# Altium PCB pay-optical.PcbDoc (part 3 of 5)
Units mm, origin at the board's own origin, x right, y up, seen from the top; angles counter-clockwise.
Board outline 128 x 54 mm, 4 copper layers (Top Layer, GND, VCC, Bottom Layer), stack 0.778 mm thick; 461 components, 247 nets, 1368 pads, 498 vias.
Unrouted connection lines stored in the file: 117.
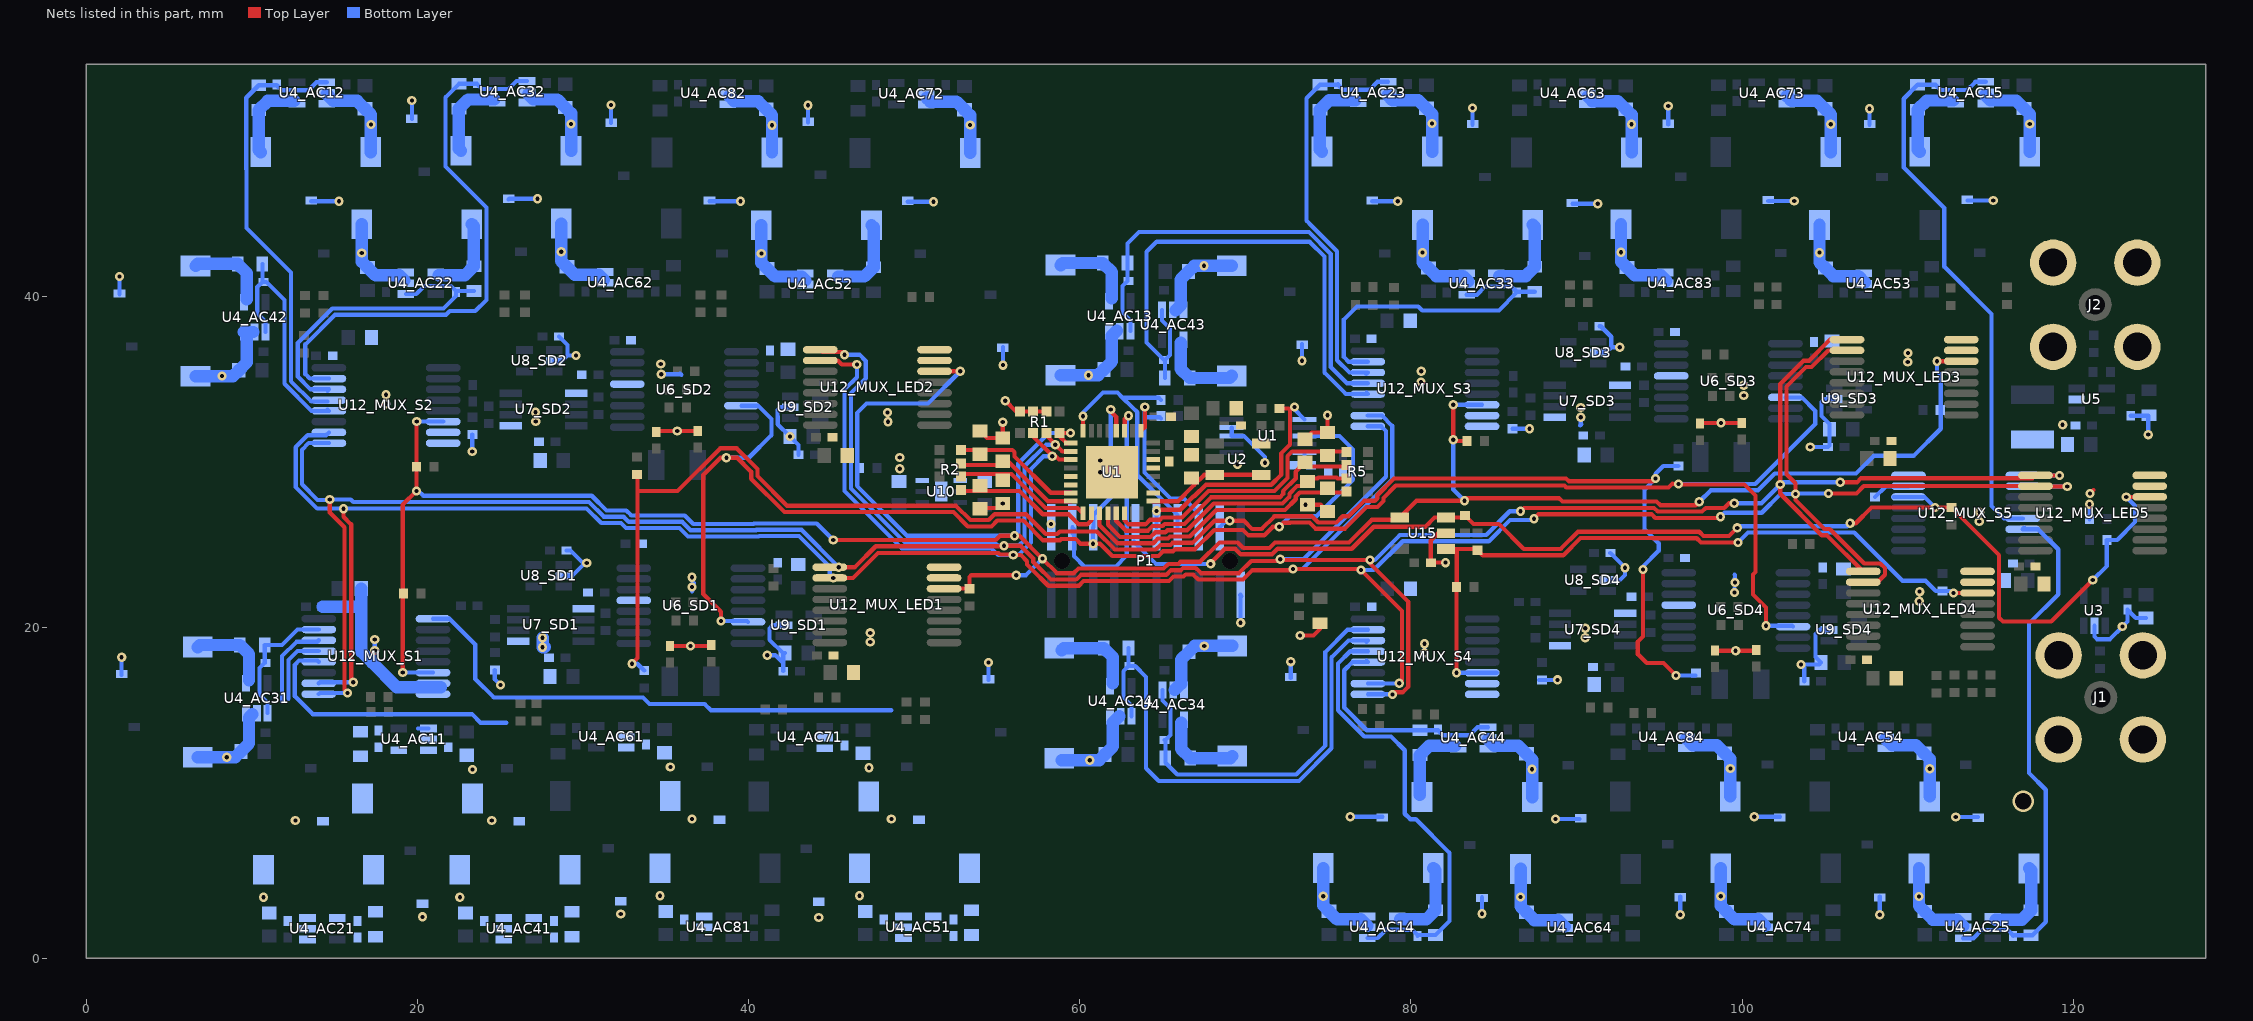
[diagram p5: the nets of this part, all layers, seen from the top]

## Via types
v1: diameter 0.559, hole 0.254, Top Layer to Bottom Layer, 442 vias
v2: diameter 2.362, hole 2.1, Top Layer to Bottom Layer, 34 vias
v3: diameter 1.3, hole 1, Top Layer to Bottom Layer, 14 vias
v4: diameter 6, hole 3.6, Top Layer to Bottom Layer, 8 vias

## Nets (pads, with @x,y where several pads share a name; then routed paths per layer and width w, separated by ;. In a path a pad name is that pad's centre, name@x,y a point inside that pad or via, vN(x,y) a via of type N, cw(c..) or ccw(c..) an arc to the next point about the centre after c; other vN are vias at no path point) (continued)
A1: R1.2 U1.3@59.461,30.124 U12_MUX_LED1.10 U12_MUX_LED2.10 U12_MUX_LED3.10 U12_MUX_LED4.10 U12_MUX_LED5.10 U12_MUX_S1.10 U12_MUX_S2.10 U12_MUX_S3.10 U12_MUX_S4.10 U12_MUX_S5.10 | length 210.1
  Top Layer w0.254: v1(15.545,27.153) 15.545,26.67 16.002,26.213 16.002,16.802 v1(16.129,16.675) ; U12_MUX_LED2.10@44.332,36.107 45.384,36.107 45.626,35.865 v1(46.54,35.865) ; v1(45.11,22.975) 46.305,22.975 47.815,24.485 55.1,24.485 55.202,24.384 55.956,24.384 v1(55.982,24.359) 56.442,24.359 56.813,23.987 56.813,23.786 57.078,23.522 58.098,22.501 59.952,22.501 60.234,22.784 65.381,22.784 65.661,23.064 66.269,23.064 66.396,23.19 66.85,23.19 67.157,22.882 69.859,22.882 70.42,23.444 v1@72.695,23.444 ; R1.2@57.182,31.735 57.182,31.515 58.344,30.353 v1(58.344,30.328) 58.539,30.328 58.743,30.124 U1.3@59.461,30.124 ; v1(72.876,23.517) 76.733,23.517 76.95,23.3 76.98,23.33 v1(76.98,23.45) 76.987,23.45 79.451,20.986 79.451,16.774 v1(79.288,16.612) ; v1(87.425,26.55) 87.702,26.827 94.525,26.827 94.751,26.601 97.788,26.601 97.792,26.596 v1@98.7,26.596 ; v1(105.209,28.075) 106.899,28.075 107.345,28.521 U12_MUX_LED5.10@117.712,28.521 117.735,28.499 v1(119.634,28.499) ; U12_MUX_LED3.10@106.333,36.717 105.199,36.717 104.193,35.711 103.865,35.711 102.681,34.527 102.681,29.238 103.225,28.694 v1(103.225,28.05) 103.225,27.675 104.969,25.931 105.291,25.931 107.375,23.847 108.338,23.847 108.619,23.566 108.619,23.17 108.167,22.718 U12_MUX_LED4.10@107.798,22.718
  Bottom Layer w0.254: U12_MUX_S1.10@14.046,16.611 14.11,16.675 v1(16.129,16.675) ; U12_MUX_S2.10@14.655,31.766 14.484,31.595 13.375,31.595 12.649,30.869 12.649,28.473 13.948,27.175 15.523,27.175 v1(15.545,27.153) 15.57,27.178 30.212,27.178 31.101,26.289 32.298,26.289 32.603,25.984 35.833,25.984 36.341,25.476 40.614,25.476 40.639,25.502 43.037,25.502 44.907,23.632 44.907,23.179 v1(45.11,22.975) ; v1(46.54,35.865) 46.54,35.092 45.796,34.349 45.796,28.223 49.254,24.765 54.666,24.765 55.073,24.359 v1(55.982,24.359) 56.29,24.359 57.048,25.117 57.048,29.56 57.816,30.328 v1(58.344,30.328) ; v1(72.876,23.517) 73.456,23.517 78.867,28.928 78.867,32.161 78.246,32.782 U12_MUX_S3.10@77.393,32.782 ; v1(76.98,23.45) 77.757,23.45 79.502,25.195 84.704,25.195 85.975,26.467 87.342,26.467 v1(87.425,26.55) ; U12_MUX_S4.10@77.4,16.597 79.273,16.597 v1(79.288,16.612) ; v1(98.7,26.675) 98.941,26.916 101.185,26.916 102.318,28.05 v1(103.225,28.05) 103.25,28.075 v1(105.209,28.075) ; U12_MUX_S5.10@116.942,28.516 116.985,28.473 117.01,28.499 v1(119.634,28.499)
A2: R1.3 U1.2@59.461,30.607 U12_MUX_LED1.9 U12_MUX_LED2.9 U12_MUX_LED3.9 U12_MUX_LED4.9 U12_MUX_LED5.9 U12_MUX_S1.9 U12_MUX_S2.9 U12_MUX_S3.9 U12_MUX_S4.9 U12_MUX_S5.9 | length 207.1
  Top Layer w0.254: v1(14.707,27.708) 14.707,26.924 15.596,26.035 15.596,16.205 v1(15.773,16.027) ; U12_MUX_LED2.9@44.332,36.757 44.462,36.627 45.618,36.627 v1(45.787,36.458) ; v1(45.441,23.625) 46.416,23.625 47.683,24.892 55.397,24.892 v1(55.423,24.917) 56.422,24.917 57.194,24.145 57.194,23.944 57.459,23.68 58.256,22.882 59.794,22.882 60.076,23.165 65.223,23.165 65.503,23.445 66.112,23.445 66.238,23.571 67.007,23.571 67.315,23.263 69.621,23.263 70.358,24 72.006,24 v1(72.111,24.105) 72.15,24.065 v1@77.525,24.065 ; R1.3@57.982,31.735 57.982,31.576 58.522,31.036 v1(58.522,31.013) ; v1@58.658,30.896 58.947,30.607 U1.2@59.461,30.607 ; v1@77.551,24.066 v1(77.525,24.066) ; v1@77.551,24.065 v1@77.525,24.065 ; v1(78.892,15.931) 79.039,16.078 79.509,16.078 79.832,16.401 79.832,21.543 77.525,23.85 v1@77.525,24.065 ; v1(86.619,27) 86.827,27.208 94.683,27.208 94.909,26.982 97.575,26.982 97.801,27.208 98.921,27.208 99.201,27.488 v1(99.525,27.488) ; v1(105.925,28.75) 106.931,28.75 107.181,29 117.541,29 U12_MUX_LED5.9@117.712,29.171 119.165,29.171 v1(119.17,29.166) ; U12_MUX_LED3.9@106.333,37.367 105.31,37.367 104.035,36.092 103.707,36.092 102.3,34.685 v1(102.3,28.625) 102.3,28.061 104.811,25.55 105.133,25.55 U12_MUX_LED4.9@107.315,23.368
  Bottom Layer w0.254: U12_MUX_S1.9@14.046,15.961 14.113,16.027 v1(15.773,16.027) ; v1@14.652,27.686 13.975,27.686 13.03,28.631 13.03,30.712 13.435,31.116 U12_MUX_S2.9@14.655,31.116 ; v1(14.707,27.708) 15.977,27.708 16.126,27.559 30.37,27.559 31.259,26.67 32.456,26.67 32.761,26.365 35.991,26.365 36.499,25.857 40.456,25.857 40.482,25.883 43.195,25.883 45.441,23.637 v1(45.441,23.625) ; v1(45.787,36.458) 46.7,36.458 47.073,36.086 47.073,35.029 46.177,34.133 46.177,28.381 49.412,25.146 54.824,25.146 55.053,24.917 v1(55.423,24.917) 56.31,24.917 56.667,25.275 56.667,29.718 57.963,31.013 v1(58.522,31.013) ; v1(72.111,24.105) 73.505,24.105 78.486,29.086 78.486,31.849 78.202,32.132 U12_MUX_S3.9@77.393,32.132 ; U12_MUX_S4.9@77.4,15.947 78.908,15.947 v1(78.892,15.931) ; v1(77.525,24.066) 77.819,24.066 79.329,25.576 84.546,25.576 85.97,27 v1(86.619,27) ; v1(99.525,27.488) 101.163,27.488 v1(102.3,28.625) 102.425,28.75 v1(105.925,28.75) ; U12_MUX_S5.9@116.942,29.166 v1(119.17,29.166) v1@119.177,29.166
ADC_C\S\_1: P1.14 R3.1@64.9,33.725 U1.32 | length 15.7
  Top Layer w0.254: U1.32@60.198,31.852 v1(60.198,32.746)
  Bottom Layer w0.254: v1(60.198,32.746) 60.198,32.962 61.407,34.171 62.279,34.171 62.596,33.853 ; R3.1@64.9,33.725 64.772,33.853 62.596,33.853 ; P1.14@65.905,26.032 65.905,26.772 63.475,29.203 63.475,32.987 63.162,33.299 63.15,33.299 62.596,33.853
ADC_S\Y\N\C\_1: P1.16 R4.1@64.9,32.766 U1.25 | length 10.8
  Top Layer w0.254: U1.25@63.703,31.852 63.932,32.08 v1(63.932,33.299)
  Bottom Layer w0.254: v1(63.932,33.299) 63.906,33.274 63.906,32.675 ; R4.1@64.9,32.6 64.825,32.675 63.906,32.675 ; P1.16@67.175,26.878 66.291,27.762 65.481,27.762 63.906,29.337 63.906,32.675
CLKIN_1: P1.18 R14_SD1.2 R14_SD2.2 R14_SD3.2 R14_SD4.2 | length 99.3
  Top Layer w0.254: v1(32.961,17.797) 33.299,18.136 33.299,28.219 ; R14_SD2.2@33.274,29.218 33.299,29.193 33.299,28.219 ; v1(94.013,23.487) 94.013,19.441 93.701,19.129 93.701,18.371 94.236,17.835 95.254,17.835 v1(96.004,17.086) ; v1@94.775,28.825 v1(94.775,28.979) 94.609,28.813 89.54,28.813 89.372,28.981 78.974,28.981 77.963,27.97 77.963,27.783 77.814,27.634 77.164,27.634 76.23,26.7 75.879,26.7 75.511,26.332 74.4,26.332 74.032,26.7 72.56,26.7 72.555,26.695 71.751,26.695 70.985,25.93 70.412,25.93 69.916,26.426 v1(69.053,26.426) 68.129,26.426 66.798,25.095 65.607,25.095 65.48,24.969 64.872,24.969 64.592,24.689 62.118,24.689 61.025,25.781 58.793,25.781 58.641,25.629 57.945,25.629 56.751,26.822 54.86,26.822 54.505,26.467 53.394,26.467 52.531,27.33 49.994,27.33 49.989,27.336 42.328,27.336 40.538,29.125 40.538,29.549 39.281,30.806 38.295,30.806 35.709,28.219 33.299,28.219
  Bottom Layer w0.254: v1(32.961,17.797) 33.279,17.797 R14_SD1.2@33.698,17.378 ; P1.18@68.445,26.032 v1@68.831,26.419 ; v1(94.013,23.487) 94.013,23.67 94.966,24.623 94.966,25.065 94.1,25.931 94.1,28.304 v1(94.775,28.979) 94.775,29.268 95.237,29.73 R14_SD3.2@96.144,29.73 ; v1(96.004,17.086) R14_SD4.2@97.18,17.086
DAC_C\S\_1: P1.12 R3.1@72.075,33.215 U1.6@73.576,32.55 | length 15.4
  Top Layer w0.254: v1(64.628,27.026) 64.628,27.097 66.068,27.097 66.878,27.907 66.916,27.907 67.615,28.606 71.567,28.606 72.163,29.201 72.163,30.487 72.7,31.024 72.7,33.14 72.625,33.215 R3.1@72.075,33.215
  Bottom Layer w0.254: v1(64.628,27.026) 64.628,26.039 P1.12@64.635,26.032 ; v1(72.975,33.3) 72.901,33.225 U1.6@73.576,32.55
E\N\: R1.4 R27_MUX_LED1.1 R27_MUX_LED2.1 R27_MUX_LED3.1 R27_MUX_S1.1 R27_MUX_S2.1 R27_MUX_S3.1 U1.1@59.461,31.115 U12_MUX_LED1.6 U12_MUX_LED2.6 U12_MUX_LED3.6 U12_MUX_S1.6 U12_MUX_S2.6 U12_MUX_S3.6 U15.4 | length 172.6
  Top Layer w0.254: v1(19.112,17.261) 19.112,27.393 v1(19.952,28.232) R27_MUX_S2.1@19.952,29.693 19.952,32.409 v1(19.959,32.416) ; v1(45.11,25.273) 54.927,25.273 55.181,25.527 v1(56.058,25.527) 56.351,25.527 v1@57.752,24.127 ; U12_MUX_LED2.6@51.232,35.457 v1(52.78,35.457) ; U12_MUX_LED1.6@51.807,22.325 R27_MUX_LED1.1@53.344,22.344 ; R27_MUX_LED1.1@53.345,22.326 R27_MUX_LED1.1@53.345,22.344 ; R27_MUX_LED1.1@53.37,22.344 R27_MUX_LED1.1@53.345,22.344 ; v1(56.163,23.143) 53.449,23.143 53.345,23.039 R27_MUX_LED1.1@53.345,22.344 ; v1(57.752,24.141) v1@57.752,24.127 ; U1.1@59.193,31.115 59.193,31.119 58.782,31.53 R1.4@58.782,31.735 v1(59.446,31.735) ; v1(82.556,33.432) v1(82.556,31.319) 82.633,31.242 R27_MUX_S3.1@83.393,31.242 ; v1(97.414,27.575) 97.202,27.363 95.067,27.363 94.83,27.6 89.15,27.6 89.131,27.619 89.118,27.619 88.949,27.788 83.388,27.788 v1(83.236,27.635) 80.331,27.635 U15.4@79.321,26.625 79.187,26.491 77.637,26.491 76.267,25.121 71.793,25.121 71.459,24.787 69.874,24.787 69.543,25.118 68.437,25.118 67.272,23.952 66.08,23.952 65.954,23.826 65.346,23.826 65.066,23.546 59.919,23.546 59.636,23.263 58.615,23.263 v1@57.752,24.127 ; v1(111.763,36.067) U12_MUX_LED3.6@113.233,36.067
  Bottom Layer w0.254: v1(19.112,17.261) U12_MUX_S1.6@20.946,17.261 ; v1(19.952,28.232) 20.066,28.232 20.358,27.94 30.528,27.94 31.417,27.051 32.614,27.051 32.919,26.746 36.149,26.746 36.657,26.238 40.298,26.238 40.324,26.264 44.12,26.264 v1(45.11,25.273) ; v1(19.959,32.416) U12_MUX_S2.6@21.555,32.416 ; v1(52.78,35.457) 50.825,33.503 47.117,33.503 46.558,32.944 46.558,28.539 49.57,25.527 v1(56.058,25.527) ; v1(56.163,23.143) 56.754,23.143 v1(57.752,24.141) ; v1@56.286,25.648 56.286,29.896 58.126,31.735 v1(59.446,31.735) ; v1(82.556,31.319) 82.556,28.315 v1(83.236,27.635) ; v1(82.556,33.432) U12_MUX_S3.6@84.293,33.432 ; v1(97.414,27.575) 98.109,28.27 100.953,28.27 101.966,29.283 106.883,29.283 107.95,30.35 110.36,30.35 111.995,31.985 111.995,35.24 111.763,35.473 v1(111.763,36.067)
GND: C1.1 C2.1 C3.1@73.75,27.394 C3.2@72.975,29.775 C4.1 C5.1 C6.1 C7.1 C8.1 C9.1 C10.1 C11.1 C12.1 C13.1 C14.1 C15.1 C16.1 C18.2 C19.1 C20_AC11.1 C20_AC12.1 C20_AC13.1 C20_AC14.1 C20_AC15.1 C20_AC21.1 C20_AC22.1 C20_AC23.1 C20_AC24.1 C20_AC25.1 C20_AC31.1 C20_AC32.1 C20_AC33.1 C20_AC34.1 C20_AC41.1 C20_AC42.1 C20_AC43.1 C20_AC44.1 C20_AC51.1 C20_AC52.1 C20_AC53.1 C20_AC54.1 C20_AC61.1 C20_AC62.1 C20_AC63.1 C20_AC64.1 C20_AC71.1 C20_AC72.1 C20_AC73.1 C20_AC74.1 C20_AC81.1 C20_AC82.1 C20_AC83.1 C20_AC84.1 C21_AC11.1 C21_AC12.1 C21_AC13.1 C21_AC14.1 C21_AC15.1 C21_AC21.1 C21_AC22.1 C21_AC23.1 C21_AC24.1 C21_AC25.1 C21_AC31.1 C21_AC32.1 C21_AC33.1 C21_AC34.1 C21_AC41.1 C21_AC42.1 C21_AC43.1 C21_AC44.1 C21_AC51.1 C21_AC52.1 C21_AC53.1 C21_AC54.1 C21_AC61.1 C21_AC62.1 C21_AC63.1 C21_AC64.1 C21_AC71.1 C21_AC72.1 C21_AC73.1 C21_AC74.1 C21_AC81.1 C21_AC82.1 C21_AC83.1 C21_AC84.1 C22.1 C23.1 C24.1 C25_SD1.2 C25_SD2.2 C25_SD3.2 C25_SD4.2 C26_SD1.2 C26_SD2.2 C26_SD3.2 C26_SD4.2 C28_SD1.1 C28_SD2.1 C28_SD3.1 C28_SD4.1 C29_SD1.1 C29_SD2.1 C29_SD3.1 C29_SD4.1 C30_SD1.1 C30_SD2.1 C30_SD3.1 C30_SD4.1 C31_SD1.2 C31_SD2.2 C31_SD3.2 C31_SD4.2 C32_SD1.1 C32_SD2.1 C32_SD3.1 C32_SD4.1 C33_SD1.1 C33_SD2.1 C33_SD3.1 C33_SD4.1 C34_SD1.1 C34_SD2.1 C34_SD3.1 C34_SD4.1 C35_SD1.1 C35_SD2.1 C35_SD3.1 C35_SD4.1 C36_SD1.1 C36_SD2.1 C36_SD3.1 C36_SD4.1 C37.1 C44_MUX_LED1.1 C44_MUX_LED2.1 C44_MUX_LED3.1 C44_MUX_LED4.1 C44_MUX_LED5.1 C44_MUX_S1.1 C44_MUX_S2.1 C44_MUX_S3.1 C44_MUX_S4.1 C44_MUX_S5.1 C45_MUX_LED1.1 C45_MUX_LED2.1 C45_MUX_LED3.1 C45_MUX_LED4.1 C45_MUX_LED5.1 C45_MUX_S1.1 C45_MUX_S2.1 C45_MUX_S3.1 C45_MUX_S4.1 C45_MUX_S5.1 D1_AC11.2 D1_AC12.2 D1_AC13.2 D1_AC14.2 D1_AC15.2 D1_AC21.2 D1_AC22.2 D1_AC23.2 D1_AC24.2 D1_AC25.2 D1_AC31.2 D1_AC32.2 D1_AC33.2 D1_AC34.2 D1_AC41.2 D1_AC42.2 D1_AC43.2 D1_AC44.2 D1_AC51.2 D1_AC52.2 D1_AC53.2 D1_AC54.2 D1_AC61.2 D1_AC62.2 D1_AC63.2 D1_AC64.2 D1_AC71.2 D1_AC72.2 D1_AC73.2 D1_AC74.2 D1_AC81.2 D1_AC82.2 D1_AC83.2 D1_AC84.2 D2_AC11.1 D2_AC12.1 D2_AC13.1 D2_AC14.1 D2_AC15.1 D2_AC21.1 D2_AC22.1 D2_AC23.1 D2_AC24.1 D2_AC25.1 D2_AC31.1 D2_AC32.1 D2_AC33.1 D2_AC34.1 D2_AC41.1 D2_AC42.1 D2_AC43.1 D2_AC44.1 D2_AC51.1 D2_AC52.1 D2_AC53.1 D2_AC54.1 D2_AC61.1 D2_AC62.1 D2_AC63.1 D2_AC64.1 D2_AC71.1 D2_AC72.1 D2_AC73.1 D2_AC74.1 D2_AC81.1 D2_AC82.1 D2_AC83.1 D2_AC84.1 D3.2 J1.2 J1.3 J1.4 J1.5 J2.2 J2.3 J2.4 J2.5 P1.2 P1.19 R1.6 R1.7 R1.8 R11.1 R12.1 R13.1 R19_SD1.1 R19_SD2.1 R19_SD3.1 R19_SD4.1 R38.1 U1.3@69.176,31.55 U1.4@69.176,32.05 U1.5@59.461,29.108 U1.6@59.461,28.6 U1.18 U1.21 U1.22 U1.33 U2.5 U3.2 U4_AC11.2 U4_AC11.3 U4_AC12.2 U4_AC12.3 U4_AC13.2 U4_AC13.3 U4_AC14.2 U4_AC14.3 U4_AC15.2 U4_AC15.3 U4_AC21.2 U4_AC21.3 U4_AC22.2 U4_AC22.3 U4_AC23.2 U4_AC23.3 U4_AC24.2 U4_AC24.3 U4_AC25.2 U4_AC25.3 U4_AC31.2 U4_AC31.3 U4_AC32.2 U4_AC32.3 U4_AC33.2 U4_AC33.3 U4_AC34.2 U4_AC34.3 U4_AC41.2 U4_AC41.3 U4_AC42.2 U4_AC42.3 U4_AC43.2 U4_AC43.3 U4_AC44.2 U4_AC44.3 U4_AC51.2 U4_AC51.3 U4_AC52.2 U4_AC52.3 U4_AC53.2 U4_AC53.3 U4_AC54.2 U4_AC54.3 U4_AC61.2 U4_AC61.3 U4_AC62.2 U4_AC62.3 U4_AC63.2 U4_AC63.3 U4_AC64.2 U4_AC64.3 U4_AC71.2 U4_AC71.3 U4_AC72.2 U4_AC72.3 U4_AC73.2 U4_AC73.3 U4_AC74.2 U4_AC74.3 U4_AC81.2 U4_AC81.3 U4_AC82.2 U4_AC82.3 U4_AC83.2 U4_AC83.3 U4_AC84.2 U4_AC84.3 U5.2 U6_SD1.5 U6_SD2.5 U6_SD3.5 U6_SD4.5 U7_SD1.1 U7_SD1.5 U7_SD2.1 U7_SD2.5 U7_SD3.1 U7_SD3.5 U7_SD4.1 U7_SD4.5 U8_SD1.2 U8_SD2.2 U8_SD3.2 U8_SD4.2 U9_SD1.2 U9_SD2.2 U9_SD3.2 U9_SD4.2 U10.3 U10.4 U10.7 U12_MUX_LED1.7 U12_MUX_LED1.8 U12_MUX_LED2.7 U12_MUX_LED2.8 U12_MUX_LED3.7 U12_MUX_LED3.8 U12_MUX_LED4.7 U12_MUX_LED4.8 U12_MUX_LED5.7 U12_MUX_LED5.8 U12_MUX_S1.7 U12_MUX_S1.8 U12_MUX_S2.7 U12_MUX_S2.8 U12_MUX_S3.7 U12_MUX_S3.8 U12_MUX_S4.7 U12_MUX_S4.8 U12_MUX_S5.7 U12_MUX_S5.8 U15.2 | length 280
  Top Layer w0.254: C25_SD2.2@34.417,31.793 34.468,31.844 v1(35.687,31.844) C26_SD2.2@36.932,31.844 ; C25_SD1.2@35.25,18.864 v1(36.5,18.864) 37.694,18.864 C26_SD1.2@37.744,18.915 ; v1(36.576,23.012) v1@36.576,23.089 ; v1@47.346,19.025 v1(47.346,19.11) ; v1@48.412,32.385 v1(48.412,32.41) ; C5.1@53.95,27.121 54.032,27.203 C6.1@55.073,27.203 ; C8.1@53.975,31.848 54.402,31.421 C7.1@55.347,31.421 v1(55.347,32.385) ; v1(55.499,33.68) 56.144,33.035 R1.8@56.382,33.035 R1.7@57.182,33.035 R1.6@57.982,33.035 ; v1(61.238,29.362) U1.33@61.951,29.362 v1(61.238,30.075) ; v1(73.308,19.5) 74.114,19.5 74.11,19.504 74.5,19.894 D3.2@74.5,20.25 ; C2.1@73.609,31.358 74.016,31.764 C1.1@74.955,31.764 v1(74.955,32.805) ; v1(73.635,27.392) 74.549,27.392 C4.1@74.955,26.986 ; v1(82.093,23.9) C12.1@81.201,23.9 81.201,25.251 81.625,25.675 U15.2@82.121,25.675 ; C25_SD3.2@97.458,32.29 97.508,32.341 v1(98.728,32.341) C26_SD3.2@99.972,32.341 ; C25_SD4.2@98.358,18.585 v1(99.608,18.585) 100.801,18.585 C26_SD4.2@100.852,18.636 ; v1@100.711,8.534 v1(100.733,8.557) ; v1(108.306,2.642) v1@108.331,2.616 ; v1@109.984,35.999 v1(110.002,36.017) ; v1(110.693,21.565) v1@110.693,21.615 ; v1(110.719,22.149) v1@110.719,22.205 ; v1(121,28.078) 121.018,28.078 121.225,28.285
  Bottom Layer w0.254: D1_AC42.2@2.013,40.107 D1_AC42.2@2.013,40.157 v1(2.013,41.179) ; D1_AC31.2@2.14,17.12 D1_AC31.2@2.14,17.17 v1(2.14,18.192) ; D1_AC12.2@13.595,45.721 v1(15.265,45.721) ; 17.28,17.854 17.447,18.021 17.424,18.044 v1(17.424,18.593) 17.421,18.593 17.428,18.6 17.421,18.607 v1(17.421,19.257) ; v1(18.11,33.49) v1(18.11,34.036) ; D1_AC22.2@19.666,50.698 v1(19.666,51.81) ; v1(23.317,30.607) R19_SD2.1@23.317,31.631 ; R19_SD1.1@24.676,17.421 24.676,16.853 v1(25.019,16.51) ; D1_AC32.2@25.508,45.83 25.55,45.872 v1(27.254,45.872) ; v1(27.135,32.987) v1@27.135,33.102 ; U8_SD2.2@28.266,36.087 28.735,36.087 29.058,36.409 ; C34_SD2.1@28.552,37.552 29.058,37.046 29.058,36.409 ; U8_SD1.2@28.829,23.114 29.369,23.114 v1@30.131,23.876 ; C34_SD1.1@29.002,24.638 29.248,24.638 30.01,23.876 v1@30.131,23.876 ; v1(29.573,36.409) 29.058,36.409 ; v1(30.226,23.876) v1@30.131,23.876 ; D1_AC62.2@31.691,50.444 v1(31.691,51.537) ; v1(34.725,35.281) 35.826,35.281 35.865,35.32 35.941,35.244 ; v1@36.576,22.174 36.601,22.2 36.576,22.225 v1(36.576,22.428) ; v1(36.576,23.012) 36.576,22.791 v1@36.703,22.664 ; D1_AC82.2@37.643,45.721 v1(39.516,45.721) ; v1(41.123,18.313) 41.613,18.313 42.096,17.831 ; C36_SD1.1@42.096,17.348 42.096,17.831 ; U9_SD1.2@42.139,20.117 41.46,20.117 41.272,19.928 41.272,19.24 42.071,18.44 C35_SD1.1@42.201,18.44 42.096,18.336 42.096,17.831 ; U9_SD2.2@42.516,33.288 41.932,33.288 41.754,33.111 41.754,32.73 41.758,32.726 41.758,32.254 v1(42.502,31.51) 43.006,31.006 C36_SD2.1@43.006,30.418 ; D1_AC52.2@43.593,50.479 D1_AC52.2@43.593,50.529 v1(43.593,51.525) ; D1_AC72.2@49.606,45.7 v1(51.174,45.7) ; v1(54.483,17.864) 54.483,16.813 D1_AC24.2@54.489,16.807 ; v1(55.36,35.827) D1_AC13.2@55.36,36.872 D1_AC13.2@55.36,36.922 ; v1(58.268,26.238) 58.268,26.055 58.288,26.035 P1.2@58.285,26.032 ; U1.4@69.176,32.05 U1.3@69.176,31.55 69.91,31.55 71.179,30.281 v1(71.178,29.926) ; v1(69.715,20.269) 69.715,21.816 69.774,21.874 69.698,21.951 P1.19@69.715,21.968 ; D1_AC34.2@72.746,16.942 D1_AC34.2@72.746,16.992 v1(72.746,17.921) ; v1(73.425,36.086) D1_AC43.2@73.425,37.059 D1_AC43.2@73.425,37.109 ; v1(76.337,8.559) D1_AC14.2@78.277,8.559 ; D1_AC23.2@77.66,45.721 v1(79.201,45.721) ; v1@80.6,34.904 80.604,34.9 v1(80.604,34.802) ; v1(80.625,35.457) 80.625,35.525 v1@80.65,35.55 ; v1(80.823,18.44) 80.823,18.925 80.748,18.999 v1(80.823,18.999) ; D1_AC33.2@83.724,50.343 D1_AC33.2@83.724,50.393 v1(83.724,51.353) ; v1(84.293,2.702) D1_AC44.2@84.293,3.647 D1_AC44.2@84.293,3.697 ; R19_SD3.1@86.131,31.987 v1(87.163,31.987) ; R19_SD4.1@87.732,16.822 v1(88.856,16.822) ; v1(88.728,8.413) D1_AC64.2@90.17,8.413 ; D1_AC63.2@89.75,45.569 v1(91.286,45.569) ; 90.225,32.177 90.3,32.252 90.25,32.302 v1(90.25,32.679) ; v1@90.25,32.7 v1@90.375,32.575 ; v1(90.526,19.932) v1@90.548,19.932 ; U8_SD3.2@91.307,36.584 91.776,36.584 92.098,36.907 ; C34_SD3.1@91.381,38.176 91.465,38.176 92.098,37.543 92.098,36.907 ; U8_SD4.2@91.894,22.845 92.619,22.845 92.931,23.157 v1(92.931,23.597) C34_SD4.1@92.042,24.486 ; v1(92.614,36.907) 92.098,36.907 ; D1_AC83.2@95.532,50.35 D1_AC83.2@95.532,50.4 v1(95.532,51.483) ; v1(96.266,2.642) D1_AC84.2@96.266,3.69 D1_AC84.2@96.266,3.74 ; v1(99.543,22.098) v1@99.543,22.335 ; v1@99.543,22.963 v1@99.568,22.938 ; 99.543,23.174 99.568,23.149 v1@99.568,22.938 ; v1(99.568,22.708) v1@99.568,22.938 ; v1(100.733,8.557) D1_AC74.2@102.28,8.557 ; D1_AC73.2@101.581,45.746 v1(103.149,45.746) ; C36_SD4.1@103.756,16.739 103.756,17.554 v1(103.556,17.755) 104.651,17.755 C35_SD4.1@104.761,17.864 104.431,18.194 104.431,19.598 104.688,19.855 105.229,19.855 U9_SD4.2@105.246,19.837 ; v1(104.115,30.886) C36_SD3.1@105.189,30.886 105.283,30.98 C35_SD3.1@105.283,31.953 105.283,32.267 104.798,32.752 104.798,33.223 104.794,33.227 104.794,33.608 104.972,33.786 U9_SD3.2@105.556,33.786 ; D1_AC53.2@107.697,50.343 D1_AC53.2@107.697,50.393 v1(107.697,51.307) ; R11.1@108.026,27.855 108.687,28.516 U12_MUX_S5.7@110.042,28.516 ; v1(108.306,2.642) D1_AC54.2@108.306,3.684 D1_AC54.2@108.306,3.734 ; v1(112.895,8.543) D1_AC25.2@114.25,8.543 ; D1_AC15.2@113.601,45.772 v1(115.169,45.772) ; v1@114.35,26.925 v1(114.35,26.94) ; v1@119.253,32.233 v1(119.355,32.233) ; R12.1@120.975,26.525 v1(120.975,27.425) ; U3.2@121.275,20.089 121.275,19.435 121.431,19.279 122.209,19.279 122.961,20.031 v1(122.961,20.041) 123.266,20.345 C23.1@123.266,21.064 123.77,20.56 C22.1@124.384,20.56 ; C18.2@123.469,32.771 124.529,32.771 v1(124.529,31.63)
  Bottom Layer w0.75: D2_AC42.1@6.603,35.164 v1(8.204,35.164) 8.863,35.164 C21_AC42.1@9.214,35.515 9.696,35.997 C20_AC42.1@9.696,36.633 9.696,37.651 U4_AC42.3@9.521,37.827 U4_AC42.2@10.084,37.827 ; D2_AC31.1@6.739,12.151 v1(8.483,12.151) 8.999,12.151 C21_AC31.1@9.35,12.502 9.831,12.984 C20_AC31.1@9.831,13.619 9.831,14.548 10.033,14.75 ; C44_MUX_S1.1@14.278,21.243 16.51,21.243 16.612,21.141 ; U4_AC12.2@14.53,52.174 14.918,51.787 C20_AC12.1@15.724,51.787 16.36,51.787 C21_AC12.1@16.841,51.305 17.192,50.954 v1(17.192,50.355) D2_AC12.1@17.192,48.694 ; C45_MUX_S1.1@16.612,22.335 16.612,21.141 ; D2_AC22.1@16.641,44.34 v1(16.641,42.595) 16.641,42.08 C21_AC22.1@16.992,41.729 17.474,41.247 C20_AC22.1@18.11,41.247 18.916,41.247 U4_AC22.2@19.198,40.966 ; 21.412,16.383 18.751,16.383 17.28,17.854 16.612,18.522 16.612,21.141 ; U4_AC32.2@26.7,52.176 27.007,51.869 C20_AC32.1@27.813,51.869 28.449,51.869 C21_AC32.1@28.93,51.387 29.281,51.036 v1(29.281,50.394) D2_AC32.1@29.281,48.776 ; v1(27.559,19.364) v1(27.559,18.796) 27.67,18.796 v1@27.682,18.807 ; D2_AC62.1@28.681,44.374 v1(28.681,42.672) 28.681,42.114 C21_AC62.1@29.032,41.763 29.514,41.281 C20_AC62.1@30.15,41.281 30.956,41.281 U4_AC62.2@31.242,40.995 ; U4_AC82.2@38.834,52.067 39.142,51.759 C20_AC82.1@39.948,51.759 40.584,51.759 C21_AC82.1@41.066,51.277 41.417,50.926 v1(41.417,50.317) D2_AC82.1@41.417,48.666 ; D2_AC52.1@40.772,44.272 v1(40.772,42.576) 40.772,42.012 C21_AC52.1@41.123,41.661 41.605,41.179 C20_AC52.1@42.24,41.179 43.199,41.179 43.434,40.945 ; 50.749,51.968 50.979,51.739 C20_AC72.1@51.911,51.739 52.547,51.739 C21_AC72.1@53.029,51.257 53.38,50.906 v1(53.38,50.322) D2_AC72.1@53.38,48.646 ; D2_AC13.1@58.845,35.222 v1(60.522,35.222) 61.105,35.222 C21_AC13.1@61.456,35.573 61.938,36.054 C20_AC13.1@61.938,36.69 61.938,37.613 U4_AC13.2@62.225,37.9 ; D2_AC24.1@58.907,11.967 v1(60.604,11.967) 61.167,11.967 C21_AC24.1@61.518,12.318 62,12.8 C20_AC24.1@62,13.436 62,14.242 U4_AC24.2@62.388,14.63 ; U4_AC34.2@65.729,16.209 66.116,16.597 C20_AC34.1@66.116,17.403 66.116,18.039 C21_AC34.1@66.598,18.521 66.949,18.872 v1(67.512,18.872) D2_AC34.1@69.209,18.872 ; U4_AC43.2@65.8,39.15 66.086,39.436 C20_AC43.1@66.086,40.356 66.086,40.992 C21_AC43.1@66.568,41.474 66.919,41.825 v1(67.503,41.825) D2_AC43.1@69.179,41.825 ; D2_AC14.1@74.705,5.453 v1(74.705,3.756) 74.705,3.193 C21_AC14.1@75.056,2.842 75.538,2.36 C20_AC14.1@76.174,2.36 76.98,2.36 U4_AC14.2@77.368,1.972 ; U4_AC23.2@78.588,52.125 78.897,51.816 C20_AC23.1@79.81,51.816 80.446,51.816 C21_AC23.1@80.927,51.334 81.278,50.983 v1(81.278,50.42) D2_AC23.1@81.278,48.723 ; D2_AC33.1@80.701,44.298 v1(80.701,42.621) 80.701,42.038 C21_AC33.1@81.052,41.687 81.533,41.205 C20_AC33.1@82.169,41.205 83.145,41.205 U4_AC33.2@83.45,40.9 ; U4_AC44.2@84.655,13.223 85.042,12.836 C20_AC44.1@85.849,12.836 86.484,12.836 C21_AC44.1@86.966,12.354 87.317,12.003 v1(87.317,11.419) D2_AC44.1@87.317,9.743 ; D2_AC64.1@86.619,5.405 v1(86.619,3.708) 86.619,3.145 C21_AC64.1@86.97,2.794 87.451,2.312 C20_AC64.1@88.087,2.312 88.893,2.312 U4_AC64.2@89.281,1.925 ; U4_AC63.2@90.675,52.05 90.957,51.768 C20_AC63.1@91.853,51.768 92.489,51.768 C21_AC63.1@92.971,51.286 93.322,50.935 v1(93.322,50.372) D2_AC63.1@93.322,48.675 ; D2_AC83.1@92.687,44.341 v1(92.687,42.644) 92.687,42.081 C21_AC83.1@93.038,41.73 93.52,41.248 C20_AC83.1@94.156,41.248 95.102,41.248 U4_AC83.2@95.425,40.925 ; U4_AC84.2@96.627,13.266 97.015,12.878 C20_AC84.1@97.821,12.878 98.457,12.878 C21_AC84.1@98.939,12.396 99.29,12.045 v1(99.29,11.462) D2_AC84.1@99.29,9.785 ; D2_AC74.1@98.708,5.45 v1(98.708,3.754) 98.708,3.19 C21_AC74.1@99.059,2.839 99.541,2.358 C20_AC74.1@100.177,2.358 100.983,2.358 U4_AC74.2@101.371,1.97 ; U4_AC73.2@102.7,52.075 102.99,51.785 C20_AC73.1@103.886,51.785 104.522,51.785 C21_AC73.1@105.003,51.303 105.354,50.952 v1(105.354,50.368) D2_AC73.1@105.354,48.692 ; D2_AC53.1@104.673,44.298 v1(104.673,42.621) 104.673,42.038 C21_AC53.1@105.024,41.687 105.506,41.205 C20_AC53.1@106.142,41.205 107.02,41.205 U4_AC53.2@107.4,40.825 ; U4_AC54.2@108.667,13.26 109.055,12.872 C20_AC54.1@109.861,12.872 110.497,12.872 C21_AC54.1@110.978,12.391 111.329,12.04 v1(111.329,11.456) D2_AC54.1@111.329,9.78 ; D2_AC25.1@110.679,5.436 v1(110.679,3.74) 110.679,3.176 C21_AC25.1@111.03,2.825 111.511,2.343 C20_AC25.1@112.147,2.343 112.953,2.343 U4_AC25.2@113.341,1.956 ; U4_AC15.2@114.675,52.125 114.989,51.811 C20_AC15.1@115.906,51.811 116.542,51.811 C21_AC15.1@117.024,51.329 117.375,50.978 v1(117.375,50.394) D2_AC15.1@117.375,48.718
  other v1: 44.241,2.47 20.308,2.508 32.277,2.677 10.703,3.697 22.565,3.697 34.649,3.79 46.695,3.79 12.63,8.331 24.492,8.331 36.577,8.424 48.622,8.424 23.333,11.403 47.265,11.519 35.277,11.558 90.526,19.364 47.346,19.66 114.325,26.383 55.347,27.477 49.125,29.566 69.521,29.825 49.125,30.25 27.15,32.416 48.387,32.969 90.25,33.275 100.1,34 100.1,34.612 34.7,35.9 110.015,36.567
MISO: P1.4 U1.27 | length 15.4
  Top Layer w0.254: U1.27@62.713,31.852 62.713,32.568 62.911,32.766 v1(62.941,32.766)
  Bottom Layer w0.254: P1.4@59.555,26.032 P1.4@59.563,26.024 ; P1.4@59.563,25.654 P1.4@59.563,26.024 ; v1(62.941,32.766) 62.911,32.766 62.832,32.687 62.832,24.325 62.154,23.647 60.3,23.647 59.657,24.29 59.657,25.93 P1.4@59.563,26.024
MOSI: P1.6 U1.8@73.576,31.55 U1.28 U6_SD1.14 U6_SD2.14 U6_SD3.14 U6_SD4.14 | length 130.7
  Top Layer w0.254: v1(38.329,20.371) 38.329,20.932 37.262,21.999 37.262,29.185 38.311,30.234 v1(38.659,30.234) 39.315,30.234 40.157,29.391 40.157,28.967 42.17,26.955 42.209,26.955 42.215,26.949 52.373,26.949 53.237,26.086 54.663,26.086 55.018,26.441 56.593,26.441 57.787,25.248 58.799,25.248 58.875,25.324 59.763,25.324 60.043,25.044 v1(60.808,25.044) 61.223,25.044 61.96,24.308 64.75,24.308 65.03,24.588 65.638,24.588 65.764,24.714 66.956,24.714 68.121,25.88 69.859,25.88 70.189,25.549 71.143,25.549 71.657,26.063 v1(72.05,26.063) 72.301,26.314 72.713,26.314 72.717,26.319 73.874,26.319 74.242,25.951 76.02,25.951 77.322,27.253 77.972,27.253 78.344,27.625 78.344,27.812 79.081,28.55 89.265,28.55 89.382,28.432 95.547,28.432 95.79,28.675 95.813,28.651 v1(96.155,28.651) 96.185,28.621 98.326,28.621 98.331,28.626 100.133,28.626 100.808,27.951 100.808,23.34 100.656,23.188 100.656,21.979 101.436,21.198 v1(101.436,20.091) ; v1(61.874,33.147) 61.798,33.147 61.773,33.122 62.205,32.69 U1.28@62.205,31.852
  Bottom Layer w0.254: v1(38.329,20.371) 39.911,20.371 U6_SD1.14@39.964,20.318 ; v1(38.659,30.234) 40.013,30.234 41.377,31.598 41.377,32.568 40.565,33.38 U6_SD2.14@39.573,33.38 ; v1(60.808,25.044) 60.808,26.015 P1.6@60.825,26.032 60.825,26.79 61.874,27.839 v1(61.874,33.147) ; v1(72.05,26.063) 72.687,26.7 74.3,26.7 76.5,28.9 76.5,30.732 75.682,31.55 U1.8@73.576,31.55 ; v1(96.155,28.651) 100.795,28.651 104.417,32.273 104.417,33.066 103.605,33.878 U6_SD3.14@102.614,33.878 ; v1(101.436,20.091) 103.019,20.091 U6_SD4.14@103.072,20.038
MUX_5_EN_1: P1.10 R7.1 R27_MUX_LED5.1 R27_MUX_S5.1 U12_MUX_LED5.6 U12_MUX_S5.6 U15.3 | length 79
  Top Layer w0.254: v1(67.903,23.826) 67.903,23.865 68.775,24.737 69.385,24.737 69.716,24.406 71.617,24.406 71.95,24.74 76.425,24.74 77.755,26.07 80.87,26.07 81.425,26.625 U15.3@82.121,26.625 83.162,26.625 R7.1@83.275,26.738 83.784,26.229 85.308,26.229 86.814,24.723 89.043,24.723 90.084,25.764 97.411,25.764 97.675,25.5 99.2,25.5 v1(99.7,26) ; v1(106.522,26.278) 106.864,26.278 107.811,27.225 v1(111.65,27.225) 112.644,27.225 R27_MUX_S5.1@112.649,27.22 115.519,24.35 115.519,20.57 115.747,20.342 118.667,20.342 v1(121.175,22.85) ; v1(123.195,27.871) U12_MUX_LED5.6@124.612,27.871
  Bottom Layer w0.254: P1.10@63.271,25.16 63.275,25.16 64.609,23.826 v1(67.903,23.826) ; v1(99.7,26) 99.8,26.1 106.344,26.1 v1(106.522,26.278) ; U12_MUX_S5.6@109.155,27.866 U12_MUX_S5.6@110.042,27.866 111.009,27.866 v1(111.65,27.225) ; v1(121.175,22.85) 122.025,23.7 R27_MUX_LED5.1@122.025,25.275 122.654,25.275 123.729,26.35 123.729,27.336 v1(123.195,27.871)
MUX_E\N\_SD4: R6.1 R27_MUX_LED4.1 R27_MUX_S4.1 U12_MUX_LED4.6 U12_MUX_S4.6 U15.1 | length 43.9
  Top Layer w0.254: v1(82.753,17.247) 82.753,22.42 R6.1@82.762,22.428 82.762,24.688 82.725,24.725 83.95,24.725 R27_MUX_LED4.1@84.025,24.65 84.333,24.342 89.2,24.342 90.242,25.383 94.648,25.383 94.656,25.375 97.261,25.375 97.517,25.119 v1(99.752,25.119) ; v1(112.764,22.068) U12_MUX_LED4.6@114.215,22.068
  Bottom Layer w0.254: v1(82.753,17.247) U12_MUX_S4.6@84.3,17.247 U12_MUX_S4.6@85.186,17.247 ; v1(99.752,25.119) 100.352,25.719 106.767,25.719 109.677,22.809 111.074,22.809 111.69,22.193 R27_MUX_S4.1@112.09,22.193 112.639,22.193 v1(112.764,22.068)
NetC1_2: C1.2@74.955,30.364 R5.5 U1.14 | length 16.6
  Top Layer w0.254: U1.14@62.713,26.873 62.713,26.438 62.768,26.383 62.789,26.383 62.789,26.362 62.938,26.213 63.961,26.213 64.241,26.493 64.849,26.493 64.975,26.619 66.167,26.619 67.773,28.225 71.761,28.225 71.761,28.23 72.544,29.014 72.544,30.329 72.827,30.612 76.109,30.612 R5.5@76.109,30.588
NetC2_2: C2.2@73.609,29.958 R5.6 U1.13 | length 16.8
  Top Layer w0.254: U1.13@62.205,26.873 62.205,26.407 62.78,25.832 64.119,25.832 64.399,26.112 65.007,26.112 65.133,26.238 66.325,26.238 67.931,27.844 72.087,27.844 72.284,28.041 72.284,28.215 73.046,28.977 73.046,29.395 C2.2@73.609,29.958 73.857,29.71 76.109,29.71 R5.6@76.109,29.788
NetC3_1: C3.1@73.975,29.775 U1.10@73.576,30.55 | length 0.9
  Bottom Layer w0.254: U1.10@73.576,30.55 73.576,30.174 C3.1@73.975,29.775
NetC3_2: C3.2@73.75,28.794 R5.7 U1.12 | length 17
  Top Layer w0.254: U1.12@61.697,26.873 61.697,26.187 62.433,25.451 64.276,25.451 64.557,25.731 65.165,25.731 65.291,25.857 66.483,25.857 68.088,27.463 72.245,27.463 72.665,27.883 72.665,28.057 73.127,28.519 73.362,28.519 73.83,28.988 74.348,28.988 74.4,29.04 75.511,29.04 75.563,28.988 R5.7@76.109,28.988
NetC4_2: C4.2 R5.8 U1.11 | length 17.5
  Top Layer w0.254: U1.11@61.189,26.873 61.189,26.157 62.275,25.07 64.434,25.07 64.714,25.35 65.323,25.35 65.449,25.476 66.64,25.476 68.241,27.076 72.397,27.076 73.046,27.725 73.046,27.899 73.285,28.138 76.109,28.138 R5.8@76.109,28.188
NetC5_2: C5.2 R2.5 U1.10@60.706,26.873 | length 9.3
  Top Layer w0.254: R2.5@52.822,28.297 52.822,28.223 56.368,28.223 57.768,26.822 59.331,26.822 59.94,26.213 60.456,26.213 60.706,26.463 U1.10@60.706,26.873
NetC6_2: C6.2 R2.6 U1.9@60.198,26.873 | length 8.5
  Top Layer w0.254: R2.6@52.822,29.175 R2.6@52.822,29.097 52.922,29.097 53.075,29.25 55.88,29.25 57.926,27.203 59.868,27.203 U1.9@60.198,26.873
NetC7_2: C7.2 R2.7 U1.8@59.461,27.61 | length 7.8
  Top Layer w0.254: R2.7@52.822,29.897 52.822,29.794 55.12,29.794 C7.2@55.347,30.021 55.675,30.021 58.087,27.61 U1.8@59.461,27.61
NetC8_2: C8.2 R2.8 U1.7@59.461,28.118 | length 7.9
  Top Layer w0.254: R2.8@52.822,30.697 55.925,30.697 56.051,30.571 56.051,30.313 58.245,28.118 U1.7@59.461,28.118
NetC16_2: C16.2 U1.17 U2.3 U2.4 | length 7.2
  Top Layer w0.254: U1.17@64.44,27.61 65.927,27.61 66.878,28.561 67.521,29.204 U2.3@68.156,29.204 U2.4@70.956,29.204
NetC17_AC11_1: C17_AC11.1 D2_AC11.2 R10_AC11.1 U4_AC11.4
NetC17_AC11_2: C17_AC11.2 R10_AC11.2 U4_AC11.1 U12_MUX_S1.13 | length 5
  Bottom Layer w0.254: 12.211,15.677 12.211,18.016 12.756,18.561 U12_MUX_S1.13@14.046,18.561 ; 20.039,13.875 U4_AC11.1@20.67,13.875
NetC17_AC12_1: C17_AC12.1 D2_AC12.2 R10_AC12.1 U4_AC12.4 | length 5
  Bottom Layer w0.75: D2_AC12.2@10.542,48.694 10.418,48.819 R10_AC12.1@10.418,51.232 10.972,51.787 C17_AC12.1@11.507,51.787 U4_AC12.4@12.555,51.787
NetC17_AC12_2: C17_AC12.2 R10_AC12.2 U4_AC12.1 U12_MUX_S2.13 | length 26.5
  Bottom Layer w0.254: U4_AC12.1@14.53,52.911 13.899,52.911 13.41,52.422 11.813,52.422 11.503,52.732 R10_AC12.2@10.418,52.732 9.663,51.978 9.663,47.675 9.677,47.661 9.677,44.109 12.37,41.416 12.37,34.849 13.594,33.624 U12_MUX_S2.13@14.564,33.624
NetC17_AC13_1: C17_AC13.1 D2_AC13.2 R10_AC13.1 U4_AC13.4 | length 5
  Bottom Layer w0.75: D2_AC13.2@58.845,41.872 58.97,41.997 R10_AC13.1@61.383,41.997 61.938,41.442 C17_AC13.1@61.938,40.907 U4_AC13.4@61.938,39.86
NetC17_AC13_2: C17_AC13.2 R10_AC13.2 U4_AC13.1 U12_MUX_S3.13 | length 28.2
  Bottom Layer w0.254: U4_AC13.1@63.063,37.884 63.063,38.515 62.574,39.004 62.574,40.601 62.883,40.911 R10_AC13.2@62.883,41.997 62.883,43.173 63.576,43.866 73.838,43.866 75.159,42.545 75.159,35.708 76.134,34.732 U12_MUX_S3.13@77.393,34.732
NetC17_AC14_1: C17_AC14.1 D2_AC14.2 R10_AC14.1 U4_AC14.4 | length 5
  Bottom Layer w0.75: U4_AC14.4@79.343,2.36 C17_AC14.1@80.39,2.36 80.925,2.36 R10_AC14.1@81.48,2.915 81.48,5.328 D2_AC14.2@81.355,5.453
NetC17_AC14_2: C17_AC14.2 R10_AC14.2 U4_AC14.1 U12_MUX_S4.13 | length 27.3
  Bottom Layer w0.254: U4_AC14.1@77.368,1.235 77.999,1.235 78.488,1.724 80.085,1.724 C17_AC14.2@80.394,1.415 ; U12_MUX_S4.13@77.4,18.547 76.332,18.547 75.593,17.808 75.593,14.983 77.176,13.4 78.802,13.4 79.629,12.573 79.629,8.738 79.959,8.407 80.289,8.407 82.321,6.375 82.321,2.256 R10_AC14.2@81.48,1.415 C17_AC14.2@80.394,1.415 ; C17_AC14.2@80.394,1.368 C17_AC14.2@80.394,1.415
NetC17_AC15_1: C17_AC15.1 D2_AC15.2 R10_AC15.1 U4_AC15.4 | length 5
  Bottom Layer w0.75: D2_AC15.2@110.725,48.718 110.6,48.843 R10_AC15.1@110.6,51.256 111.155,51.811 C17_AC15.1@111.69,51.811 U4_AC15.4@112.737,51.811
NetC17_AC15_2: C17_AC15.2 R10_AC15.2 U4_AC15.1 U12_MUX_S5.13 | length 34.6
  Bottom Layer w0.254: U4_AC15.1@114.712,52.935 114.081,52.935 113.592,52.446 111.995,52.446 111.686,52.756 R10_AC15.2@110.6,52.756 109.759,51.915 109.759,47.756 112.202,45.313 112.202,41.772 115.062,38.913 115.062,27.325 115.821,26.566 U12_MUX_S5.13@116.942,26.566
NetC17_AC21_1: C17_AC21.1 D2_AC21.2 R10_AC21.1 U4_AC21.4
NetC17_AC21_2: C17_AC21.2 R10_AC21.2 U4_AC21.1 U12_MUX_S1.14 | length 5.3
  Bottom Layer w0.254: 11.83,15.52 11.83,18.255 12.693,19.119 13.954,19.119 U12_MUX_S1.14@14.046,19.211
NetC17_AC22_1: C17_AC22.1 D2_AC22.2 R10_AC22.1 U4_AC22.4 | length 5
  Bottom Layer w0.75: U4_AC22.4@21.279,41.247 C17_AC22.1@22.326,41.247 22.861,41.247 R10_AC22.1@23.416,41.802 23.416,44.215 D2_AC22.2@23.291,44.34
NetC17_AC22_2: C17_AC22.2 R10_AC22.2 U4_AC22.1 U12_MUX_S2.14 | length 19.8
  Bottom Layer w0.254: U12_MUX_S2.14@14.564,34.274 U12_MUX_S2.14@14.655,34.366 13.544,34.366 12.776,35.134 12.776,37.166 14.859,39.249 21.57,39.249 22.326,40.004 C17_AC22.2@22.326,40.247 ; U4_AC22.1@19.303,40.123 19.934,40.123 20.423,40.612 22.02,40.612 22.33,40.302 R10_AC22.2@23.416,40.302
NetC17_AC23_1: C17_AC23.1 D2_AC23.2 R10_AC23.1 U4_AC23.4 | length 5
  Bottom Layer w0.75: D2_AC23.2@74.628,48.723 74.504,48.848 R10_AC23.1@74.504,51.261 75.058,51.816 C17_AC23.1@75.593,51.816 U4_AC23.4@76.641,51.816
NetC17_AC23_2: C17_AC23.2 R10_AC23.2 U4_AC23.1 U12_MUX_S3.14 | length 24.5
  Bottom Layer w0.254: C17_AC23.2@75.589,52.808 C17_AC23.2@75.589,52.761 ; U12_MUX_S3.14@77.302,35.29 U12_MUX_S3.14@77.393,35.382 76.282,35.382 75.54,36.125 75.54,42.703 73.996,44.247 73.991,44.247 73.685,44.552 73.685,51.943 R10_AC23.2@74.504,52.761 C17_AC23.2@75.589,52.761 ; U4_AC23.1@78.616,52.941 77.985,52.941 77.496,52.452 75.899,52.452 C17_AC23.2@75.589,52.761
NetC17_AC24_1: C17_AC24.1 D2_AC24.2 R10_AC24.1 U4_AC24.4 | length 5
  Bottom Layer w0.75: D2_AC24.2@58.907,18.617 59.032,18.742 R10_AC24.1@61.445,18.742 62,18.187 C17_AC24.1@62,17.652 U4_AC24.4@62,16.605
NetC17_AC24_2: C17_AC24.2 R10_AC24.2 U4_AC24.1 U12_MUX_S4.14 | length 31.8
  Bottom Layer w0.254: R10_AC24.2@62.945,18.742 C17_AC24.2@62.945,17.656 ; C17_AC24.2@62.992,17.656 C17_AC24.2@62.945,17.656 ; C17_AC24.2@63,17.652 63.348,17.652 64.008,16.993 64.008,11.481 64.77,10.719 73.234,10.719 75.209,12.695 75.209,18.181 76.225,19.197 U12_MUX_S4.14@77.4,19.197 U12_MUX_S4.14@77.308,19.105 ; U4_AC24.1@63.125,14.63 63.125,15.26 62.636,15.749 62.636,17.347 C17_AC24.2@62.945,17.656
NetC17_AC25_1: C17_AC25.1 D2_AC25.2 R10_AC25.1 U4_AC25.4 | length 5
  Bottom Layer w0.75: U4_AC25.4@115.316,2.343 C17_AC25.1@116.364,2.343 116.899,2.343 R10_AC25.1@117.453,2.898 117.453,5.311 D2_AC25.2@117.329,5.436
NetC17_AC25_2: C17_AC25.2 R10_AC25.2 U4_AC25.1 U12_MUX_S5.14 | length 32.1
  Bottom Layer w0.254: U4_AC25.1@113.341,1.219 113.972,1.219 114.461,1.708 116.058,1.708 C17_AC25.2@116.368,1.398 ; C17_AC25.2@116.368,1.351 C17_AC25.2@116.368,1.398 ; U12_MUX_S5.14@117.034,26.008 U12_MUX_S5.14@116.942,25.916 117.878,25.916 119.089,24.706 119.089,21.985 117.325,20.221 117.325,11.2 118.339,10.186 118.339,2.21 117.527,1.398 R10_AC25.2@117.453,1.398 C17_AC25.2@116.368,1.398
  other v3: 116.975,9.5
NetC17_AC31_1: C17_AC31.1 D2_AC31.2 R10_AC31.1 U4_AC31.4 | length 5
  Bottom Layer w0.75: D2_AC31.2@6.739,18.801 6.863,18.926 R10_AC31.1@9.277,18.926 9.831,18.371 C17_AC31.1@9.831,17.836 U4_AC31.4@9.831,16.789
NetC17_AC31_2: C17_AC31.2 R10_AC31.2 U4_AC31.1 U12_MUX_S1.15 | length 8.1
  Bottom Layer w0.254: U4_AC31.1@10.956,14.813 10.956,15.444 10.467,15.933 10.467,17.53 10.777,17.84 R10_AC31.2@10.777,18.926 11.821,18.926 12.756,19.861 U12_MUX_S1.15@14.046,19.861
NetC17_AC32_1: C17_AC32.1 D2_AC32.2 R10_AC32.1 U4_AC32.4 | length 5
  Bottom Layer w0.75: D2_AC32.2@22.631,48.776 22.507,48.901 R10_AC32.1@22.507,51.314 23.061,51.869 C17_AC32.1@23.596,51.869 U4_AC32.4@24.644,51.869
NetC17_AC32_2: C17_AC32.2 R10_AC32.2 U4_AC32.1 U12_MUX_S2.15 | length 34.2
  Bottom Layer w0.254: U12_MUX_S2.15@14.655,35.016 13.498,35.016 13.233,35.281 13.233,37.084 15.017,38.868 21.728,38.868 21.951,39.091 23.497,39.091 24.17,39.764 24.17,45.345 24.116,45.4 24.116,45.415 24.108,45.415 21.692,47.831 21.692,51.999 R10_AC32.2@22.507,52.814 23.592,52.814 23.902,52.504 25.499,52.504 25.988,52.993 U4_AC32.1@26.619,52.993
NetC17_AC33_1: C17_AC33.1 D2_AC33.2 R10_AC33.1 U4_AC33.4 | length 5
  Bottom Layer w0.75: U4_AC33.4@85.338,41.205 C17_AC33.1@86.386,41.205 86.921,41.205 R10_AC33.1@87.475,41.76 87.475,44.173 D2_AC33.2@87.351,44.298
NetC17_AC33_2: C17_AC33.2 R10_AC33.2 U4_AC33.1 U12_MUX_S3.15 | length 19.6
  Bottom Layer w0.254: U12_MUX_S3.15@77.393,36.032 76.236,36.032 75.946,36.322 75.946,38.58 76.736,39.37 80.442,39.37 80.681,39.131 85.311,39.131 C17_AC33.2@86.386,40.205 ; U4_AC33.1@83.363,40.08 83.994,40.08 84.483,40.569 86.08,40.569 86.39,40.26 R10_AC33.2@87.475,40.26
NetC17_AC34_1: C17_AC34.1 D2_AC34.2 R10_AC34.1 U4_AC34.4 | length 5
  Bottom Layer w0.75: U4_AC34.4@66.116,14.234 C17_AC34.1@66.116,13.187 66.116,12.652 R10_AC34.1@66.671,12.097 69.084,12.097 D2_AC34.2@69.209,12.222
NetC17_AC34_2: C17_AC34.2 R10_AC34.2 U4_AC34.1 U12_MUX_S4.15 | length 24.2
  Bottom Layer w0.254: U4_AC34.1@64.992,16.209 64.992,15.578 65.481,15.089 65.481,13.492 C17_AC34.2@65.171,13.183 ; C17_AC34.2@65.124,13.183 C17_AC34.2@65.171,13.183 ; U12_MUX_S4.15@77.4,19.847 76.164,19.847 74.828,18.511 74.828,12.852 73.076,11.1 65.888,11.1 65.171,11.816 R10_AC34.2@65.171,12.097 C17_AC34.2@65.171,13.183
NetC17_AC41_1: C17_AC41.1 D2_AC41.2 R10_AC41.1 U4_AC41.4
NetC17_AC41_2: C17_AC41.2 R10_AC41.2 U4_AC41.1 U12_MUX_S1.12 | length 16.9
  Bottom Layer w0.254: U12_MUX_S1.12@14.046,17.911 13.967,17.99 12.855,17.99 12.592,17.727 12.592,15.835 13.677,14.75 23.292,14.75 23.813,14.23 25.369,14.23
NetC17_AC42_1: C17_AC42.1 D2_AC42.2 R10_AC42.1 U4_AC42.4 | length 5
  Bottom Layer w0.75: D2_AC42.2@6.603,41.814 6.728,41.939 R10_AC42.1@9.141,41.939 9.696,41.384 C17_AC42.1@9.696,40.849 U4_AC42.4@9.696,39.802
NetC17_AC42_2: C17_AC42.2 R10_AC42.2 U4_AC42.1 U12_MUX_S2.12 | length 14.8
  Bottom Layer w0.254: R10_AC42.2@10.641,41.939 C17_AC42.2@10.641,40.853 ; U4_AC42.1@10.821,37.827 10.821,38.458 10.332,38.947 10.332,40.544 C17_AC42.2@10.641,40.853 ; U12_MUX_S2.12@14.576,33.145 U12_MUX_S2.12@14.655,33.066 13.613,33.066 11.979,34.701 11.979,39.752 10.877,40.853 C17_AC42.2@10.641,40.853
NetC17_AC43_1: C17_AC43.1 D2_AC43.2 R10_AC43.1 U4_AC43.4 | length 5
  Bottom Layer w0.75: U4_AC43.4@66.086,37.187 C17_AC43.1@66.086,36.14 66.086,35.605 R10_AC43.1@66.641,35.05 69.054,35.05 D2_AC43.2@69.179,35.175
NetC17_AC43_2: C17_AC43.2 R10_AC43.2 U4_AC43.1 U12_MUX_S3.12 | length 33.1
  Bottom Layer w0.254: U4_AC43.1@64.962,39.162 64.962,38.532 65.451,38.043 65.451,36.445 65.141,36.136 R10_AC43.2@65.141,35.05 ; C17_AC43.2@65.086,36.14 64.033,37.192 64.033,42.672 64.643,43.282 73.883,43.282 74.778,42.387 74.778,35.373 76.068,34.082 U12_MUX_S3.12@77.393,34.082 U12_MUX_S3.12@77.314,34.161
NetC17_AC44_1: C17_AC44.1 D2_AC44.2 R10_AC44.1 U4_AC44.4 | length 4.8
  Bottom Layer w0.75: D2_AC44.2@80.542,9.868 R10_AC44.1@80.542,12.281 81.097,12.836 C17_AC44.1@81.632,12.836 U4_AC44.4@82.679,12.836
NetC17_AC44_2: C17_AC44.2 R10_AC44.2 U4_AC44.1 U12_MUX_S4.12 | length 13.6
  Bottom Layer w0.254: U12_MUX_S4.12@77.32,17.976 U12_MUX_S4.12@77.4,17.897 76.469,17.897 75.974,17.402 75.974,15.141 77.334,13.781 R10_AC44.2@80.542,13.781 81.628,13.781 81.938,13.471 83.535,13.471 84.024,13.96 U4_AC44.1@84.655,13.96
NetC17_AC51_1: C17_AC51.1 D2_AC51.2 R10_AC51.1 U4_AC51.4
NetC17_AC51_2: C17_AC51.2 R10_AC51.2 U4_AC51.1 U12_MUX_S1.1 | length 31.2
  Bottom Layer w0.254: U12_MUX_S1.1@20.946,20.511 21.937,20.511 23.495,18.953 23.495,16.876 24.617,15.754 26,15.754 26.006,15.748 33.632,15.748 34.013,15.367 37.35,15.367 37.731,14.986 48.613,14.986
NetC17_AC52_1: C17_AC52.1 D2_AC52.2 R10_AC52.1 U4_AC52.4 | length 5
  Bottom Layer w0.75: U4_AC52.4@45.41,41.179 C17_AC52.1@46.457,41.179 46.992,41.179 R10_AC52.1@47.547,41.734 47.547,44.147 D2_AC52.2@47.422,44.272